# Altium PCB mainPCB.PcbDoc
Units mil, origin at the board's own origin, x right, y up, seen from the top; angles counter-clockwise.
Board outline 1968.5 x 3300 mil, 2 copper layers (Top Layer, Bottom Layer); 28 components, 22 nets, 80 pads, 0 vias.
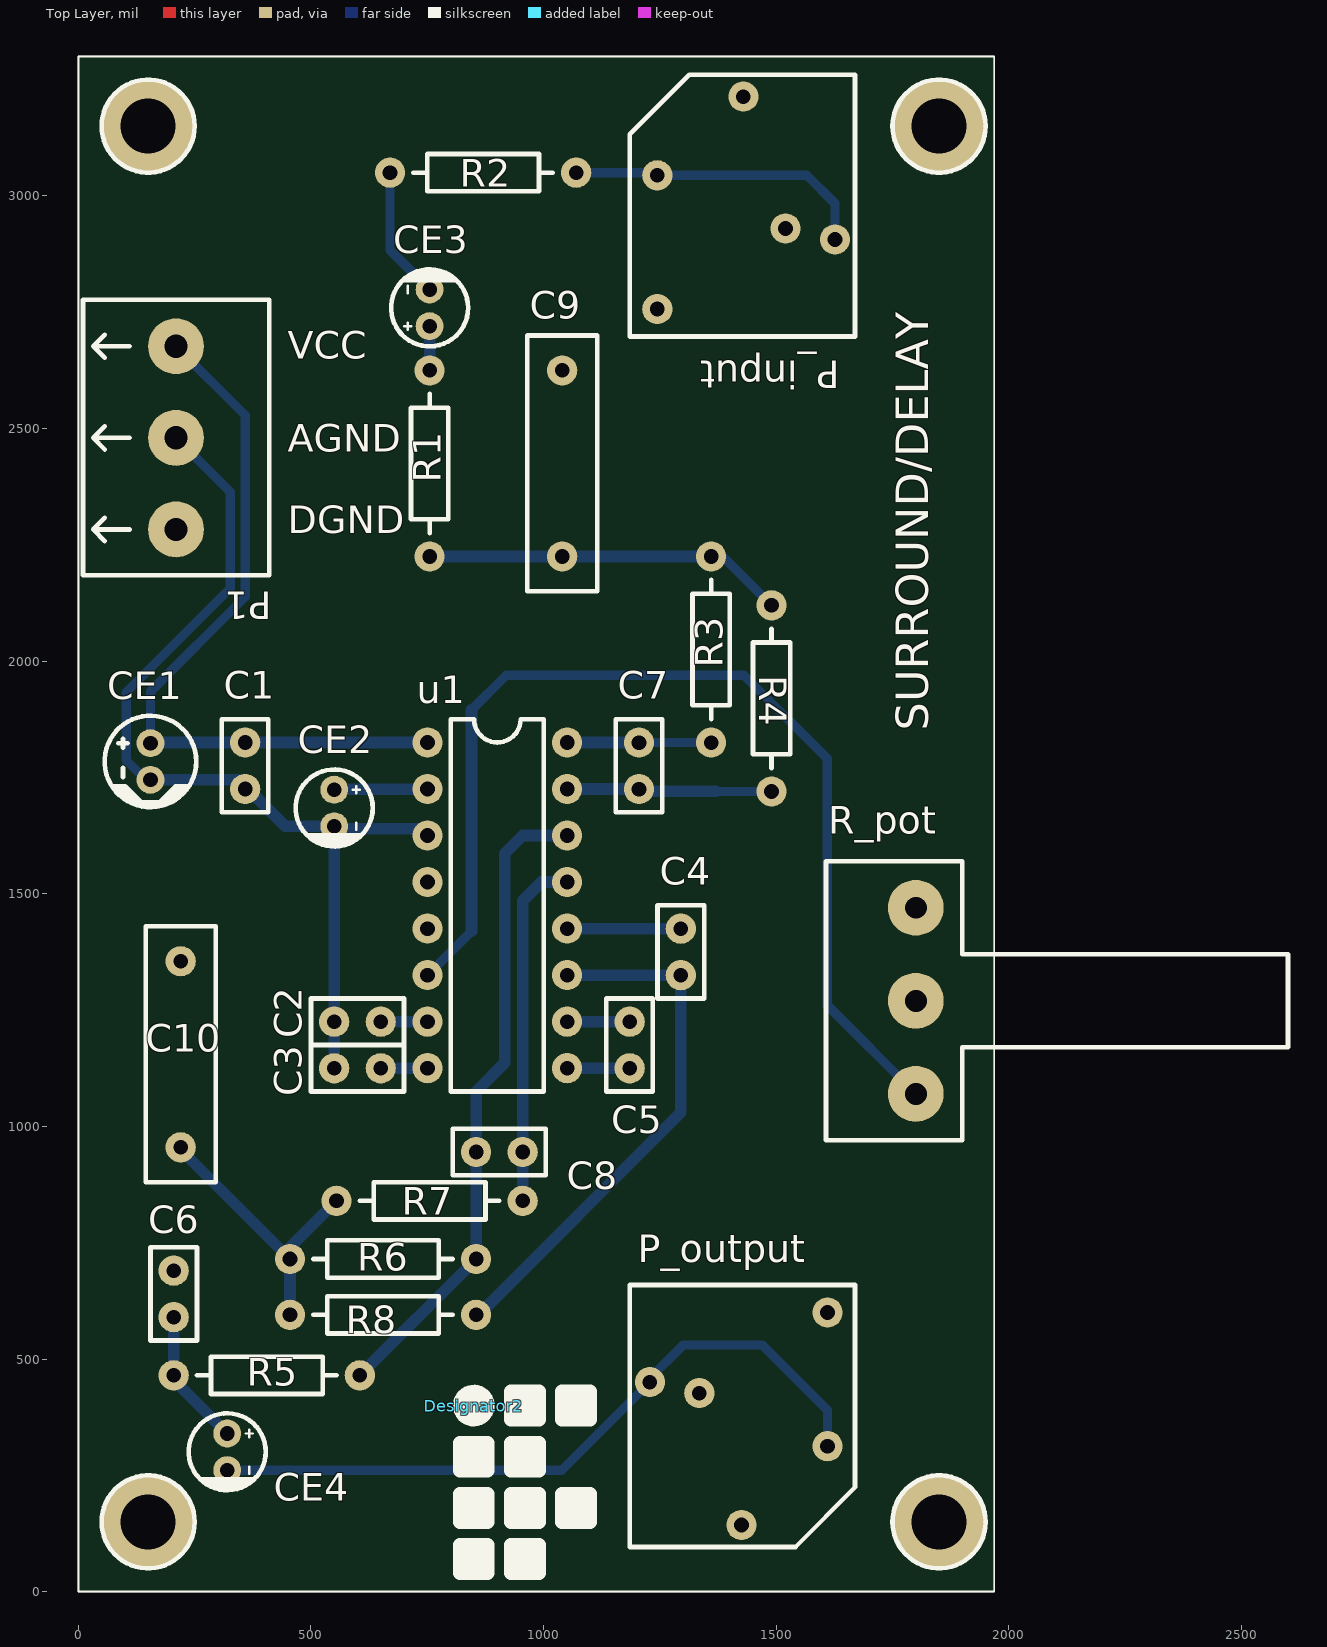
[diagram p0: Top Layer view]
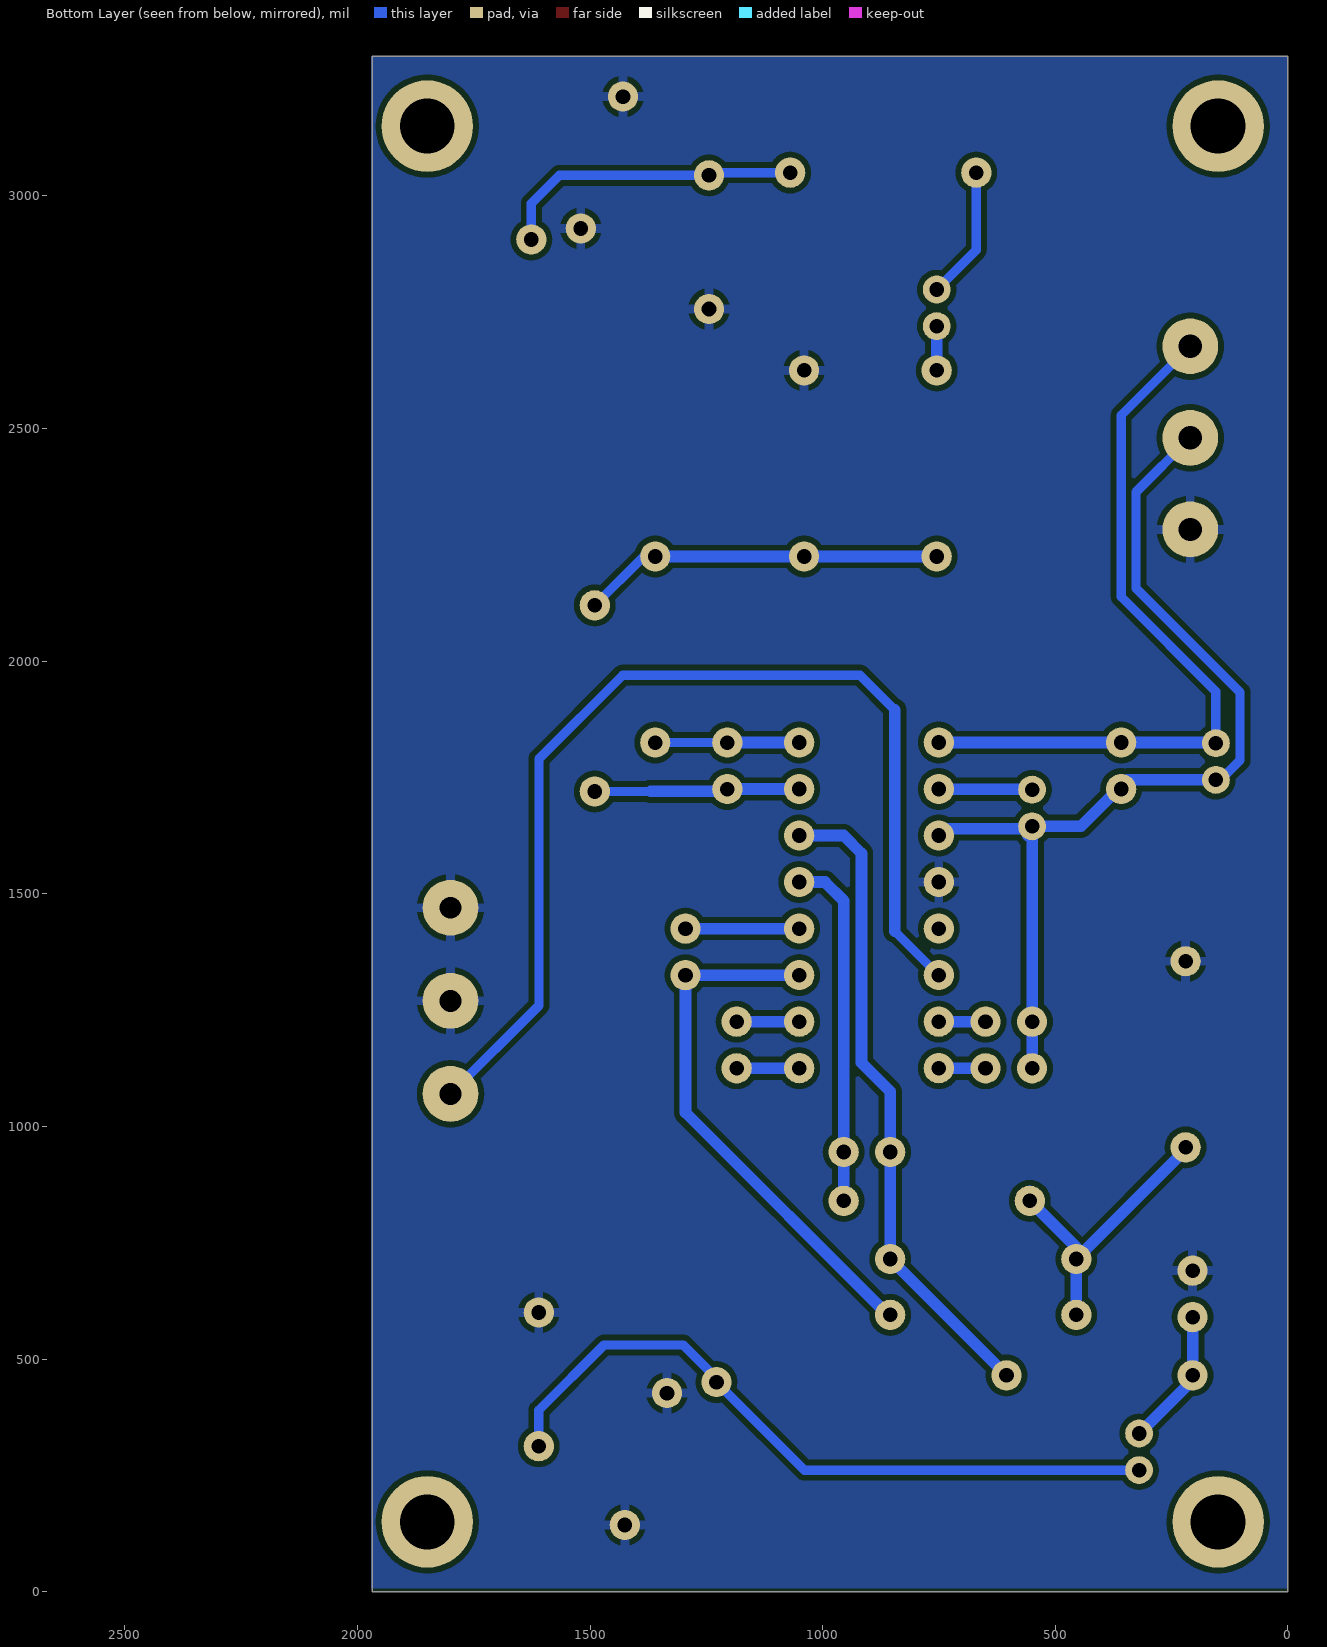
[diagram p1: Bottom Layer view, seen from below]
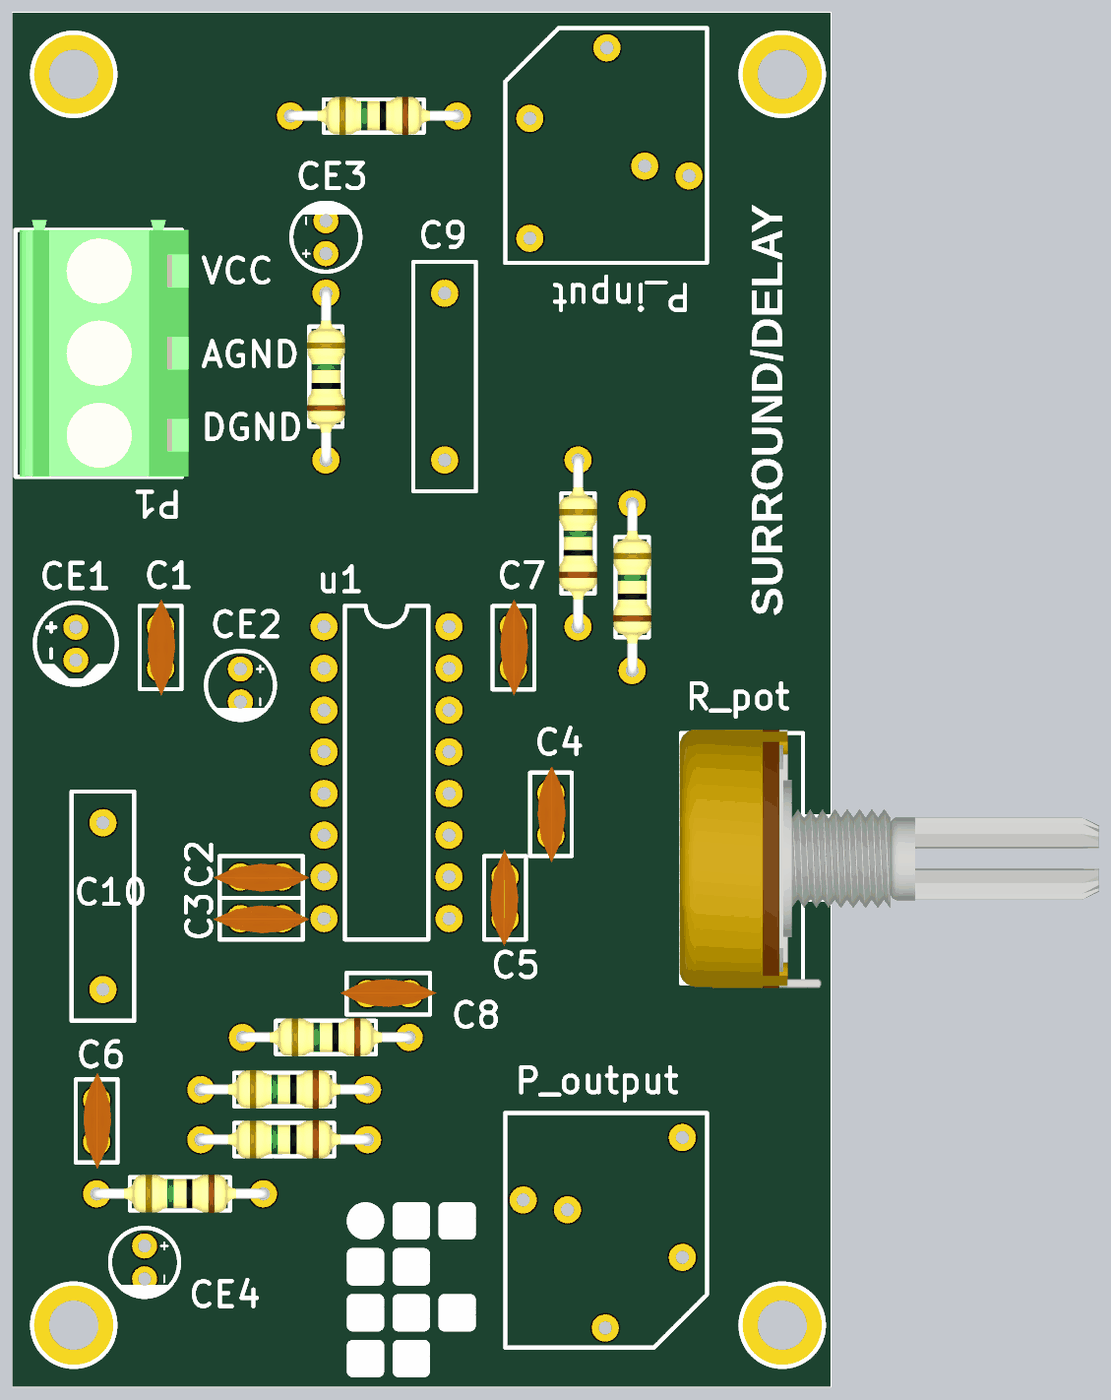
[diagram p2: 3D render of the assembled board from above, using the file's embedded part models]

## Layer stack, top to bottom
Top Solder: solder mask 0.4, Solder Resist, Dk 3.5
Top Layer: signal copper 1.4
Dielectric 1: dielectric 12.6, FR-4, Dk 4.8
Bottom Layer: signal copper 1.4
Bottom Solder: solder mask 0.4, Solder Resist, Dk 3.5

## Board outline
0,0 0,3300 1968.5,3300 1968.5,0

## Design rules (kind name [scope] priority, off if disabled: settings)
Clearance [All] p1: gap=12 ignorepadtopadclearanceinfootprint=FALSE
PlaneConnect [All] p1: planeconnectstyle=Relief reliefexpansion=20 reliefentries=4 reliefconductorwidth=20 reliefairgap=12
PolygonConnect [All] p1: connectstyle=Relief reliefconductorwidth=20 reliefentries=4 polygonreliefangle="90 Angle" airgapwidth=12
RoutingVias [All] p1: holewidth=28 width=50 viastyle="Through Hole" minholewidth=28 minwidth=50 maxholewidth=28 maxwidth=50
SolderMaskExpansion [All] p1: expansion=4
Width [All] p1: maxlimit=30 minlimit=20 preferedwidth=20
29 further rules are at their usual default settings.

## Components (designator, comment, footprint, x,y, rotation, side; value= is the part's Value field where it differs from the comment)
C1 "0.1uF" C100-200-100 358.54,1725.2 r90 top
C2 "0.1uF" C100-200-100 550,1225 r0 top
C3 "0.1uF" C100-200-100 550,1125 r0 top
C4 "0.1uF" C100-200-100 1295,1325 r90 top
C5 "0.1uF" C100-200-100 1185,1225 r270 top
C6 "0.1uF" C100-200-100 205,590 r90 top
C7 "560pF" C100-200-100 1205,1725 r90 top
C8 "560pF" C100-200-100 955,945 r180 top
C9 "5600pF" C400-550-150 1040,2225 r90 top
C10 "5600pF" C400-550-150 220,955 r90 top
CE1 "100uF" CP-RAD-5.0mm-15.0mm-2.0mm 155,1823.74 r270 top
CE2 "47uF" PCBComponent_1 550,1723.74 r270 top
CE3 "4.7uF" PCBComponent_1 755,2720 r90 top
CE4 "10uF" PCBComponent_1 320,340 r270 top
Designator2 "Comment" IFSC_TOP_LARGE 850,400 r0 top
P1 "Terminal" KRE_3 210,2676.85 r270 top
P_input "Alim" jack_p2_v1 1244.41,2756.77 r0 top
P_output "Alim" jack_p2_v1 1610.35,600 r180 top
R1 "15k" R400-2.0mm 755,2225 r90 top
R2 "100k" R400-2.0mm 1070,3050 r180 top
R3 "10k" R400-2.0mm 1360,1825 r90 top
R4 "15k" R400-2.0mm 1490,1720 r90 top
R5 "2.7k" R400-2.0mm 605,465 r180 top
R6 "15k" R400-2.0mm 855,715 r180 top
R7 "10k" R400-2.0mm 955,840 r180 top
R8 "15k" R400-2.0mm 855,595 r180 top
R_pot "Value" POT 1800,1070 r90 top
u1 "pt2399_dip16" dip16 750.55,1825.2 r0 top

## Footprints (in the part's own frame and the unit in brackets; to place one, negate y for a bottom-side part, rotate by r counter-clockwise, add the part's x,y. Pads: shape width x height; smd on the part's side, far side on the other; paste and mask are expansions set on the pad)
C100-200-100 [mil] "Radial Cap, Thru-Hole; 2 Leads; 0.1 in Pin Spacing"
  round 65 hole 31.5: 1(0,0) 2(100,0)
  silkscreen extent -50,-50 150,50, body extent -65,-35 165,32, height 245
C400-550-150 [mil] "Radial Cap, Thru-Hole; 2 Leads; 0.4 in Pin Spacing"
  round 65 hole 31.5: 1(0,0) 2(400,0)
  silkscreen extent -75,-75 475,75
CP-RAD-5.0mm-15.0mm-2.0mm [mil] "Radial Capacitor; D 5.0mm; L 15.0mm; P 2.0mm"
  round 60 hole 31.5: 1(0,0) 2(78.74,0)
  silkscreen extent -59,-98 138,98
dip16 [mil]
  round 65 hole 31.5: 1(0,0) 2(0,-100) 3(0,-200) 4(0,-300) 5(0,-400) 6(0,-500) 7(0,-600) 8(0,-700) 9(300,-700) 10(300,-600) 11(300,-500) 12(300,-400) 13(300,-300) 14(300,-200) 15(300,-100) 16(300,0)
  silkscreen extent 50,-750 250,50
IFSC_TOP_LARGE [mil] "IFSC trademark large size"
  silkscreen extent -40,-360 250,40
jack_p2_v1 [mm]
  round 1.651 hole 0.8: 1(0,0) 1(4.7,11.6) 1(7,4.4) 2(0,7.3) 3(9.7,3.8)
  silkscreen extent -1.5,-1.5 10.79,12.8
KRE_3 [mil] "Terminal Block 3 pins"
  round 120 hole 50: 1(0,0) 2(196.85,0) 3(393.7,0)
  silkscreen extent -100,-200 492,200, body extent -123,-190 491,216, height 559
PCBComponent_1 [mil]
  round 60 hole 31.5: 1(0,0) 2(78.74,0)
  silkscreen extent -43,-83 122,83
POT [mil] "Connector; Header; 3 Position"
  round 120 hole 47.24: 1(0,0) 2(200,0) 3(400,0)
  silkscreen extent -100,-800 500,193, body extent -111,-809 509,197, height 799
R400-2.0mm [mil] "Axial Device, Thru-Hole; 2 Leads; 0.4 in Pin Spacing"
  round 65 hole 31.5: 1(0,0) 2(400,0)
  silkscreen extent 50,-40 350,40, body extent -12,-46 412,45, height 116

## Part data
C1 C2 C3 C4 C5 C6 C7 C8 C9 C10: library part Capacitor, "Capacitor", Voltage="100 V", LatestRevisionDate=17-Jul-2002, LatestRevisionNote="Re-released for DXP Platform.", PackageReference=RAD-0.3, Published=8-Jun-2000, Publisher="Altium Limited"
CE1 CE2 CE3 CE4: library part Capacitor-Electrolytic, "Electrolytic Capacitor", Voltage="25 V"
P1: library part KRE_3, "Terminal Block 1x3"
P_input P_output: library part Jack_J4, "Jack J4"
R1 R2 R3 R4 R5 R6 R7 R8: library part Resistor, "Resistor", Power="1/4 W", Tolerance=5%, LatestRevisionDate=17-Jul-2002, LatestRevisionNote="Re-released for DXP Platform.", PackageReference=AXIAL-0.3, Published=8-Jun-2000, Publisher="Altium Limited"
R_pot: library part Potentiometer, "Potentiometer", Type=Lin

## Free pads (board coordinates)
  round 196.85 hole 118.11: 0(150,150) 0(150,3150) 0(1850,150) 0(1850,3150)

## Nets (pads, with @x,y where several pads share a name; then routed paths per layer and width w, separated by ;. In a path a pad name is that pad's centre, name@x,y a point inside that pad or via, vN(x,y) a via of type N, cw(c..) or ccw(c..) an arc to the next point about the centre after c; other vN are vias at no path point)
AGND: C1.1 C2.1 C3.1 CE1.2 CE2.2 P1.2 u1.3 | length 2099
  Bottom Layer w20: CE1.2 145,1745 103,1787 103,1933 326.54,2156.54 326.54,2363.46 P1.2 ; CE2.2@550,1650 CE2.2@560,1640
  Bottom Layer w25: CE1.2 345,1745 445,1645 CE2.2 ; C3.1 C2.1 CE2.2 ; CE2.2@550,1650 CE2.2 ; CE2.2@558.94,1625.2 558.94,1636.06 CE2.2 ; CE2.2@560,1640 735.75,1640 u1.3
DGND: C6.2 C9.2 C10.2 P1.3 P_input.1 P_output.1 R_pot.2 R_pot.3 u1.4 | length 0.3
  Bottom Layer w25: u1.4@750.35,1525 u1.4
NetC1_2: C1.2 CE1.1 P1.1 u1.1 | length 1595.1
  Bottom Layer w20: CE1.1 155,1935 358.54,2138.54 358.54,2528.31 P1.1
  Bottom Layer w25: CE1.1 156.46,1825.2 C1.2 u1.1
NetC2_2: C2.2 u1.7 | length 100.9
  Bottom Layer w25: C2.2 650.2,1225.2 u1.7 u1.7@750.35,1225
NetC3_2: C3.2 u1.8 | length 100.6
  Bottom Layer w25: C3.2 650.2,1125.2 u1.8
NetC4_1: C4.1 R8.1 u1.11 | length 1161.8
  Bottom Layer w25: R8.1@855,590 1295,1030 1295,1324.8 1294.8,1325 1294.8,1325.2 u1.11
NetC4_2: C4.2 u1.12 | length 244.5
  Bottom Layer w25: u1.12 1294.8,1425.2 C4.2
NetC5_1: C5.1 u1.10 | length 134.5
  Bottom Layer w25: u1.10 1184.8,1225.2 C5.1
NetC5_2: C5.2 u1.9 | length 134.5
  Bottom Layer w25: u1.9 1184.8,1125.2 C5.2
NetC6_1: C6.1 CE4.1 R5.2 | length 297.6
  Bottom Layer w20: R5.2@205,455 R5.2
  Bottom Layer w25: R5.2@205,455 CE4.1 ; R5.2 C6.1
NetC7_1: C7.1 R4.1 u1.15 | length 441.6
  Bottom Layer w20: 1370,1720 R4.1
  Bottom Layer w25: u1.15 1204.8,1725.2 C7.1 1210,1720 1370,1720
NetC7_2: C7.2 R3.1 u1.16 | length 309.5
  Bottom Layer w20: C7.2 R3.1
  Bottom Layer w25: u1.16 1204.8,1825.2 C7.2
NetC8_1: C8.1 R7.1 u1.13 | length 757.2
  Bottom Layer w25: R7.1 C8.1 955,1485 995.2,1525.2 u1.13
NetC8_2: C8.2 R5.1 R6.1 u1.14 | length 1400.6
  Bottom Layer w25: R5.1 R6.1 C8.2 855,1075 916.69,1136.69 916.69,1586.69 955.2,1625.2 u1.14
NetC9_1: C9.1 R1.1 R3.2 R4.2 | length 768.5
  Bottom Layer w20: R3.2 1385,2225 R4.2
  Bottom Layer w25: R1.1@765,2225 C9.1 R3.2
NetC10_1: C10.1 R6.2 R7.2 R8.2 | length 652.9
  Bottom Layer w25: C10.1@210,960 R6.2 ; R8.2 R6.2 ; R7.2@555,860 R7.2 455,740 R6.2
NetCE2_1: CE2.1 u1.2 | length 170.6
  Bottom Layer w25: 580,1725 750.35,1725 u1.2
NetCE3_1: CE3.1 R1.2 | length 95
  Bottom Layer w25: R1.2 CE3.1
NetCE3_2: CE3.2 R2.2 | length 286.5
  Bottom Layer w20: R2.2 670,2883.74 CE3.2
NetCE4_2: CE4.2 P_output.2 P_output.3 | length 1541.6
  Bottom Layer w20: CE4.2 1039.33,261.26 P_output.3 1228.46,458.46 1300,530 1470,530 1610.35,389.65 P_output.2
NetP_input_2: P_input.2 P_input.3 R2.1 | length 661.1
  Bottom Layer w20: R2.1 1238.58,3050 P_input.2 1565.83,3044.17 1626.3,2983.7 P_input.3
NetR_pot_1: R_pot.1 u1.6 | length 2278.3
  Bottom Layer w20: u1.6 845,1419.65 ; 845,1895 920,1970 1430,1970 1610,1790 1610,1260 R_pot.1
  Bottom Layer w25: 845,1419.65 845,1895
pads on no net: u1.5

## Polygon pours and split planes (outlines as drawn)
DGND on Bottom Layer "Bottom Layer-No Net" (solid, remove dead copper, pour order 0): 1.54,3300 1970.04,3300 1970.04,7.27 1.54,7.27

## Silkscreen, mask and mechanical layers (free items; w line width, h text height)
Top Overlay:
  circle w10: c150,3150 r100
  circle w10: c1850,3150 r100
  circle w10: c150,150 r100
  circle w10: c1850,150 r100
  lines w4: 0,0 1968.5,0 1968.5,3300 0,3300 0,0
  text "VCC" at 450,2650 h60
  text "AGND" at 450,2450 h60
  text "DGND" at 450,2275 h60
  text "SURROUND/DELAY" at 1850,1850 h120 r90